# Altium PCB PCB1_MPPT_Charger_V1.PcbDoc
Units mm, origin at the board's own origin, x right, y up, seen from the top; angles counter-clockwise.
Board outline 132 x 99 mm, 2 copper layers (Top Layer, Bottom Layer); 115 components, 82 nets, 482 pads, 0 vias.
Unrouted connection lines stored in the file: 314.
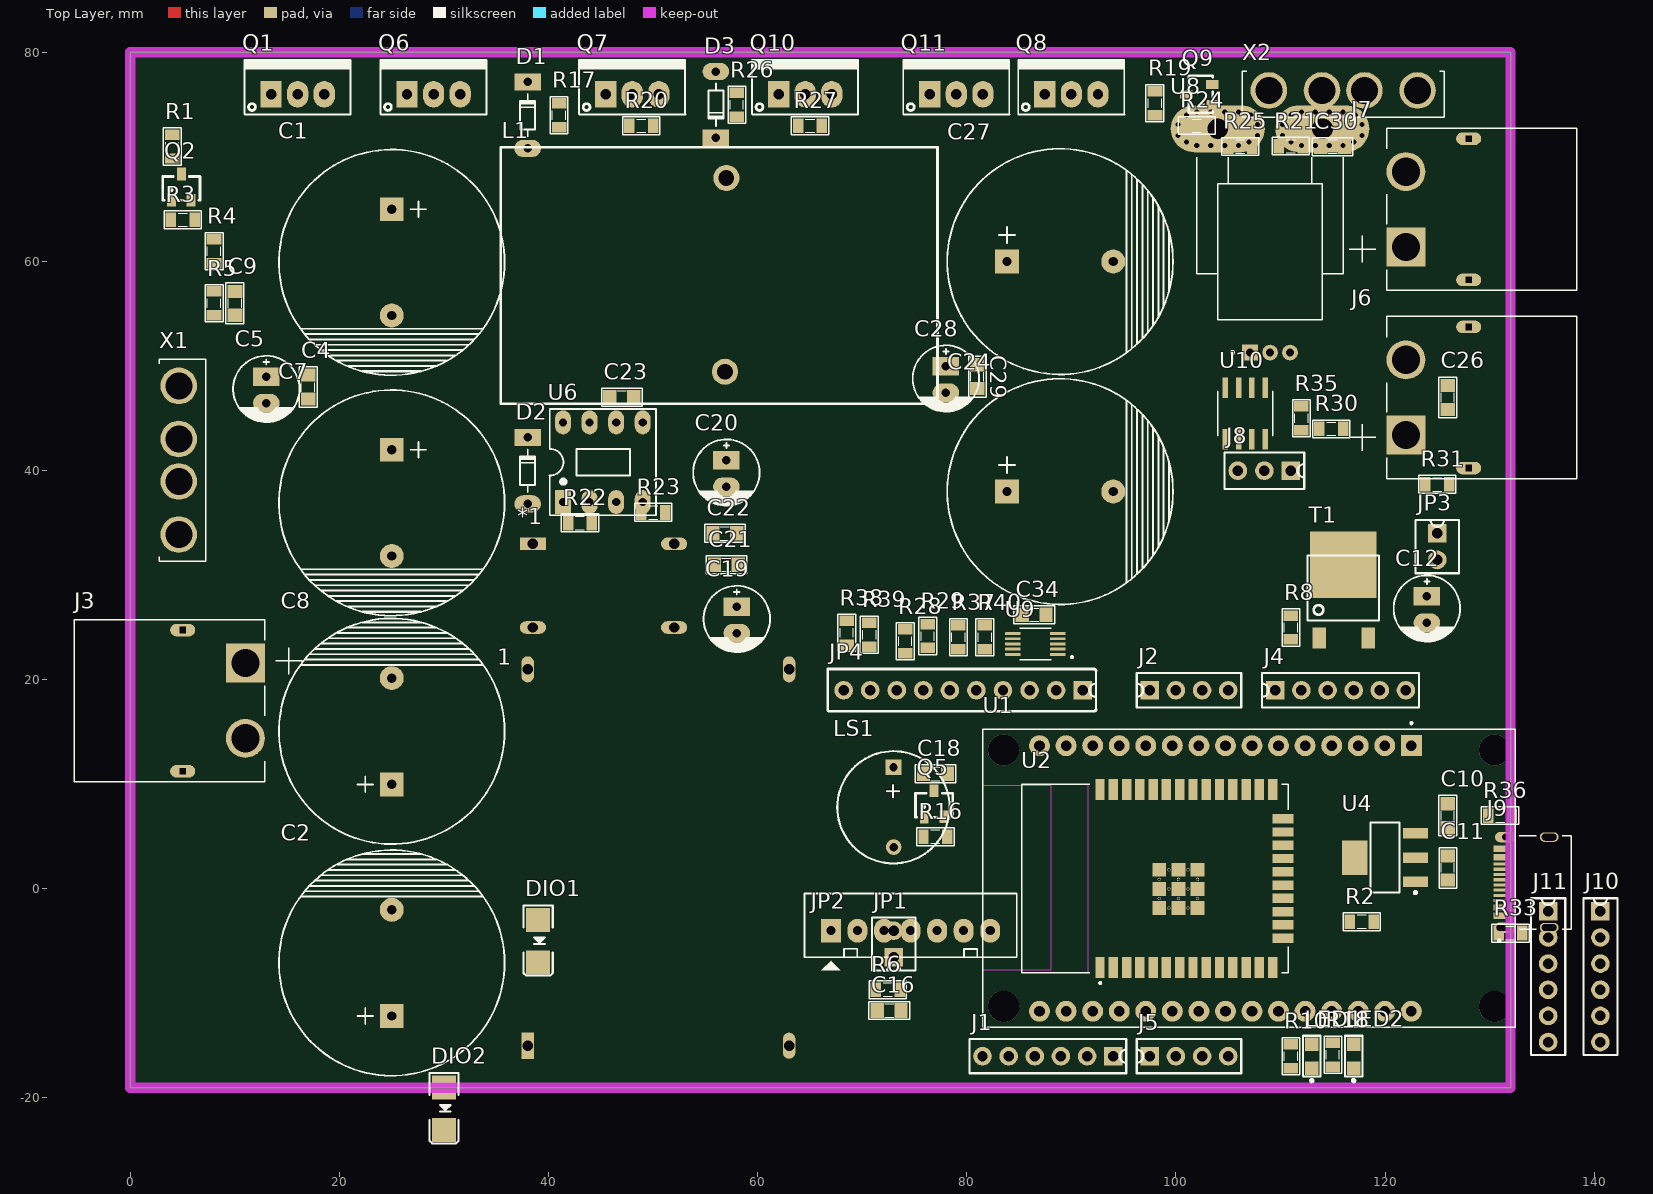
[diagram p0: Top Layer view]
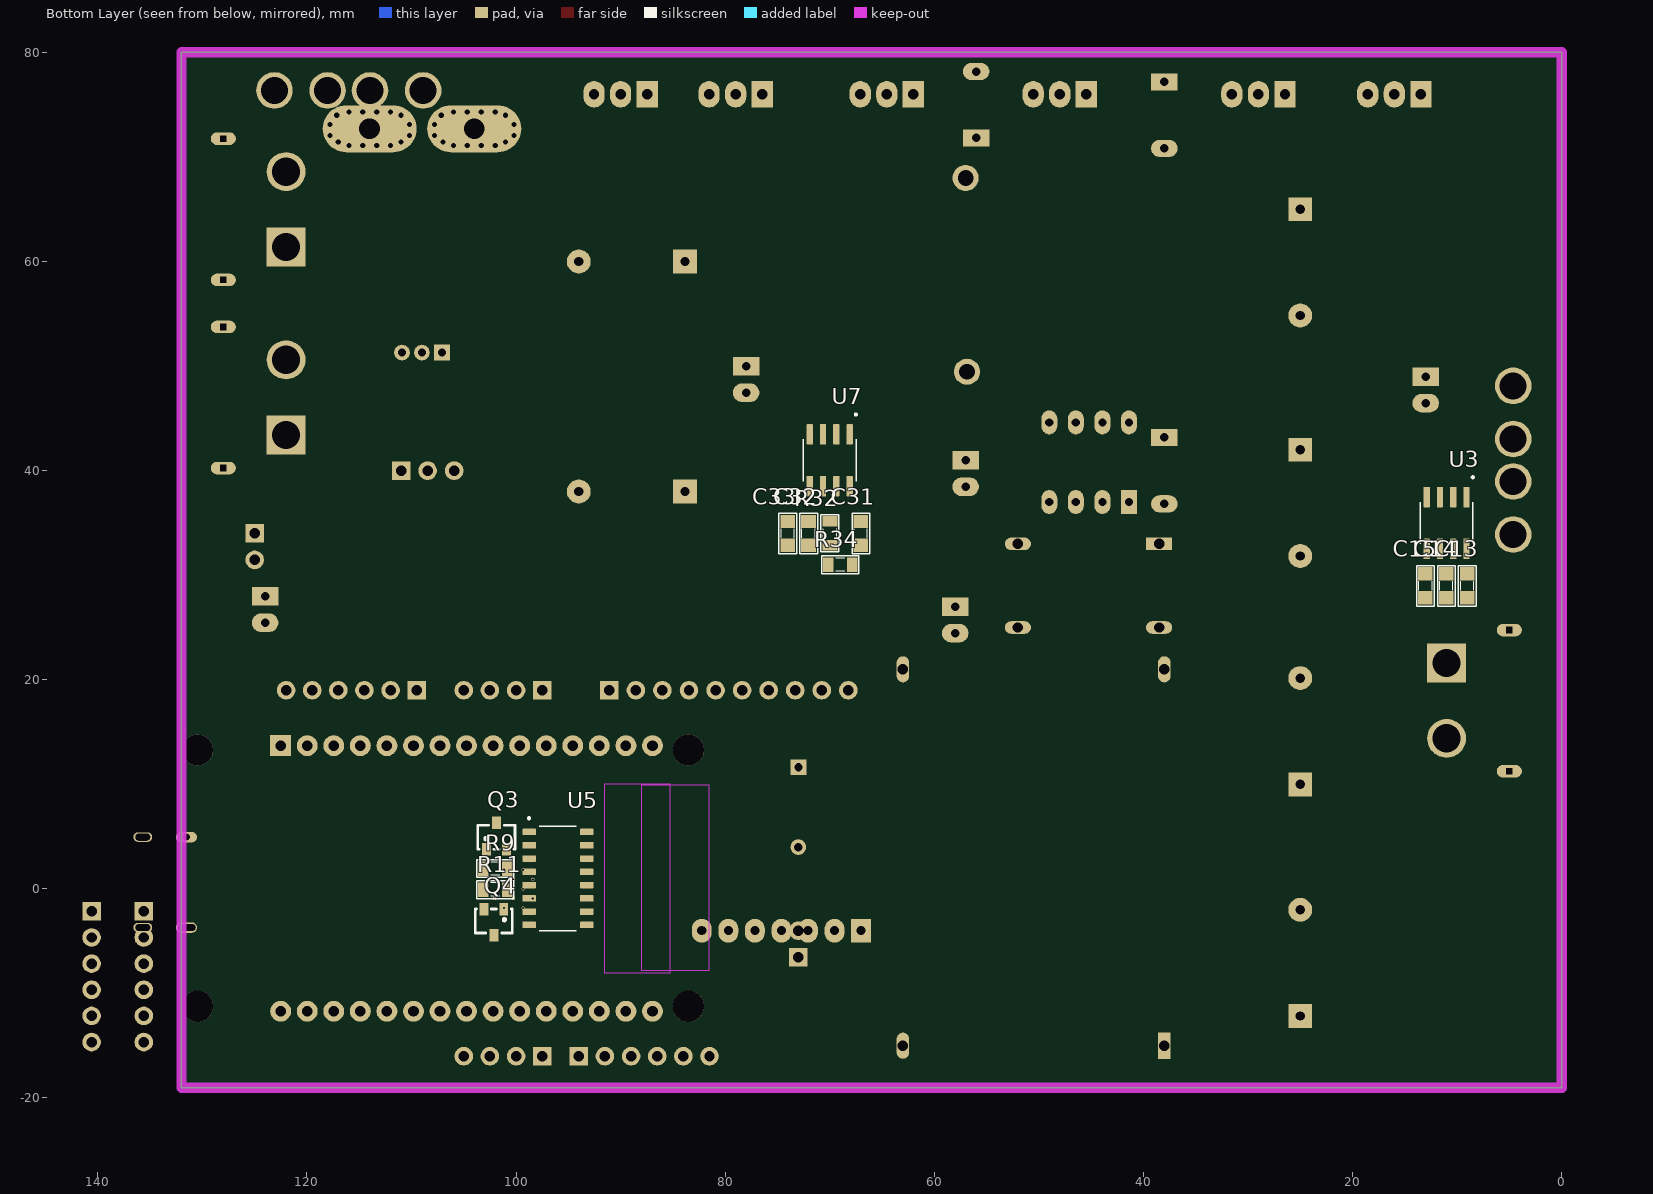
[diagram p1: Bottom Layer view, seen from below]

## Layer stack, top to bottom
Top Solder: solder mask 0.0102, Solder Resist, Dk 3.5
Top Layer: signal copper 0.0356
Dielectric 1: dielectric 0.32, FR-4, Dk 4.8
Bottom Layer: signal copper 0.0356
Bottom Solder: solder mask 0.0102, Solder Resist, Dk 3.5

## Board outline
0,-19 0,80 132,80 132,-19

## Design rules (kind name [scope] priority, off if disabled: settings)
Clearance [All] p1: gap=0.254 ignorepadtopadclearanceinfootprint=FALSE except(0: Arc-Hole Track-Hole SMDPad-Hole THPad-Hole Via-Hole Fill-Hole Poly-Hole Region-Hole Text-Hole)
PolygonConnect [All] p1: connectstyle=Relief reliefconductorwidth=0.254 reliefentries=4 polygonreliefangle="90 Angle" airgapwidth=0.254
RoomDefinition SCH_MPPT_Charger_V1 [InComponentClass('SCH_MPPT_Charger_V1')] p1: confinementstyle=ConfineIn formatcopy=TRUE lockcomponents=FALSE outline -263.398,-41.148 -212.598,-41.148 -212.598,-15.748 -263.398,-15.748
RoutingVias [All] p1: holewidth=0.711 width=1.27 viastyle="Through Hole" minholewidth=0.711 minwidth=1.27 maxholewidth=0.711 maxwidth=1.27
SolderMaskExpansion [All] p1: expansion=0.102 istentingtop=FALSE
Width [All] p1: maxlimit=0.254 minlimit=0.254 preferedwidth=0.254
30 further rules are at their usual default settings.

## Components (designator, comment, footprint, x,y, rotation, side; value= is the part's Value field where it differs from the comment)
1 "3A" "90-12V BUCK" 38,-15 r90 top
*1 "12-5V Buck" "12-5V BUCK" 38.5,33 r0 top
C1 "4700uF/50V" CP4/8.5 25,65 r270 top
C2 "4700uF/50V" CP4/8.5 25,-12.16 r90 top
C4 "104" 0805 17,48 r90 top value=0.1uF
C5 "100uF" CP1/2.5 13,49 r270 top value="47uF/16 - 50V"
C7 "4700uF/50V" CP4/8.5 25,42 r270 top
C8 "4700uF/50V" CP4/8.5 25,10 r90 top
C9 "104" 0805 10,56 r270 top value=0.1uF
C10 "104" 0805 126,7 r270 top value=0.1uF
C11 "104" 0805 126,2 r90 top value=0.1uF
C12 "100uF" CP1/2.5 124,28 r270 top value="47uF/16 - 50V"
C13 "104" 0805 9.025,29 r90 bottom value=0.1uF
C14 "104" 0805 11.025,29 r90 bottom value=0.1uF
C15 "104" 0805 13.025,29 r90 bottom value=0.1uF
C16 "104" 0805 72.568,-11.635 r180 top value=0.1uF
C18 "104" 0805 77,11 r180 top value=0.1uF
C19 "100uF" CP1/2.5 58,27 r270 top value="47uF/16 - 50V"
C20 "100uF" CP1/2.5 57,41 r270 top value="47uF/16 - 50V"
C21 "104" 0805 57,31 r180 top value=0.1uF
C22 "104" 0805 56.857,34 r180 top value=0.1uF
C23 "104" 0805 47,47 r180 top value=0.1uF
C24 "4700uF/50V" CP4/8.5 83.84,38 r0 top
C26 "104" 0805 126,47 r270 top value=0.1uF
C27 "4700uF/50V" CP4/8.5 83.84,60 r0 top
C28 "100uF" CP1/2.5 78,50 r270 top value="47uF/16 - 50V"
C29 "104" 0805 81,49 r90 top value=0.1uF
C30 "104" 0805 115,71 r0 top value=0.1uF
C31 "104" 0805 67.025,34 r90 bottom value=0.1uF
C32 "104" 0805 72.025,34 r90 bottom value=0.1uF
C33 "104" 0805 74.025,34 r90 bottom value=0.1uF
C34 "104" 0805 86.432,26.218 r180 top value=0.1uF
D1 "1N4148" D0.5A 38,74 r270 top
D2 "1N4148" D0.5A 38,40 r270 top
D3 "1N4148" D0.5A 56,75 r90 top
DIO1 "Diode SMD" DIO-SMD-106 39,-5 r90 top value=1N5007
DIO2 "Diode SMD" DIO-SMD-106 30,-21.032 r90 top value=1N5007
J1 "CON6" CON6 94,-16 r270 top
J2 "UART_PORT" CON4 97.5,19 r90 top
J3 "XT60PW-M" AMASS_XT60PW-M 5,18 r90 top
J4 "KEY" CON6 109.5,19 r90 top
J5 "I2C_PORT" CON4 97.5,-16 r90 top
J6 "BAT" AMASS_XT60PW-M 128,47 r270 top
J7 "LOAD" AMASS_XT60PW-M 128,65 r270 top
J8 "CON3" CON3 111,40 r270 top
J9 "CSP-USC16-TR" VALCON_CSP-USC16-TR 130.93,0.627 r90 top
J10 "CON6" CON6 140.602,-2.148 r0 top
J11 "CON6" CON6 135.602,-2.148 r0 top
JP1 "NTC" CON2 73,-6.54 r180 top value="Connector 2"
JP2 "LCD" CON7 67,-4 r0 top value="Connector 7"
JP3 "FAN" CON2 125,34 r0 top value="Connector 2"
JP4 "JP10" CON10 91.08,19 r270 top value="Connector 10"
L1 "60uH" 100UH 56.873,51.363 r90 top
LED1 "LED 0805" LED0805 113,-16 r90 top
LED2 "LED 0805" LED0805 117,-16 r90 top
LS1 "Speaker" SPEAKER 72.987,11.62 r270 top
Q1 "IRF840" QTO-220 13.46,76 r0 top
Q2 "C1815" SOT23B 5,67 r0 top
Q3 "C1815" SOT23B 101.746,4.931 r180 bottom
Q4 "C1815" SOT23B 102.254,-3.069 r0 bottom
Q5 "C1815" SOT23B 77,8 r0 top
Q6 "IRF840" QTO-220 26.46,76 r0 top
Q7 "IRF840" QTO-220 45.46,76 r0 top
Q8 "IRF840" QTO-220 87.46,76 r0 top
Q9 "C1815" SOT23B 102.377,76.127 r90 top
Q10 "IRF840" QTO-220 62,76 r0 top
Q11 "IRF840" QTO-220 76.46,76 r0 top
R1 "10k" RES-SMD-0805 4,71 r90 top
R2 "10k" RES-SMD-0805 117.77,-3.129 r0 top
R3 "1k" RES-SMD-0805 5,64 r0 top
R4 "220k" RES-SMD-0805 8,61 r90 top
R5 "4.7k" RES-SMD-0805 8,56 r90 top
R6 "10k" RES-SMD-0805 72.425,-9.635 r0 top
R8 "1k" RES-SMD-0805 111,25 r90 top
R9 "10k" RES-SMD-0805 102,1.931 r0 bottom
R10 "2.2k" RES-SMD-0805 111,-16 r90 top
R11 "10k" RES-SMD-0805 102,-0.069 r180 bottom
R16 "1k" RES-SMD-0805 77,5 r0 top
R17 "100" RES-SMD-0805 41,74 r270 top
R18 "1k" RES-SMD-0805 115,-15.857 r90 top
R19 "10k" RES-SMD-0805 98,75.143 r270 top
R20 "100k" RES-SMD-0805 48.857,73 r0 top
R21 "220k" RES-SMD-0805 110.995,71.031 r180 top
R22 "10k" RES-SMD-0805 43,35 r180 top
R23 "10k" RES-SMD-0805 50,36 r180 top
R24 "1k" RES-SMD-0805 102,73 r180 top
R25 "4.7k" RES-SMD-0805 106.143,71 r180 top
R26 "100" RES-SMD-0805 58,75 r90 top
R27 "100k" RES-SMD-0805 65,73 r0 top
R28 "1k" RES-SMD-0805 74.113,23.678 r270 top
R29 "10k" RES-SMD-0805 76.272,24.186 r270 top
R30 "10k" RES-SMD-0805 114.857,44 r0 top
R31 "100" RES-SMD-0805 125,38.687 r180 top
R32 "2.2k" RES-SMD-0805 69.975,34 r270 bottom
R33 "5.11k" RES-SMD-0805 132,-4.221 r0 top
R34 "3.3k" RES-SMD-0805 69,31 r0 bottom
R35 "1k" RES-SMD-0805 112,45 r90 top
R36 "5.11k" RES-SMD-0805 131,7 r180 top
R37 "1k" RES-SMD-0805 79.193,24.059 r90 top
R38 "10k" RES-SMD-0805 68.516,24.504 r270 top
R39 "10k" RES-SMD-0805 70.684,24.313 r270 top
R40 "10k" RES-SMD-0805 81.733,24.059 r270 top
T1 "TIP 41C" TO252_NEW 116.063,27.507 r0 top
U1 "ESP32-DEVKIT-V1" MODULE_ESP32_DEVKIT_V1 107,1 r270 top
U2 "ESP32-WROOM-32D" MODULE_ESP32-WROOM-32D 98,1 r90 top
U3 "ACS712ELCTR30AT" SOIC127P600X175-8N 11,35 r270 bottom
U4 "LM1117-3.3V" SOT223 120,3 r90 top
U5 "CH340G" SOIC127P600X180-16N 96,1 r180 bottom
U6 "IR2104" dip8 45.063,40.81 r0 top
U7 "ACS712ELCTR30AT" SOIC127P600X175-8N 70,41 r270 bottom
U8 "ACS758LCB-100B-PFF-T" XDCR_ACS770KCB-150U-PFF-T 109,62 r0 top
U9 "ADS1115IDGST" SOP50P490X110-10N 86.559,23.424 r180 top
U10 "MAX4213ESA" 21-0041B_8 106.635,45.464 r270 top
X1 "20A" FUSE_3522-2 5,41 r90 top
X2 "3522-2" FUSE_3522-2 116,76 r0 top

## Footprints (in the part's own frame and the unit in brackets; to place one, negate y for a bottom-side part, rotate by r counter-clockwise, add the part's x,y. Pads: shape width x height; smd on the part's side, far side on the other; paste and mask are expansions set on the pad)
"12-5V BUCK" [mm]
  rect 2.5x1.2 hole 1: 1(0,0)
  oval 2.5x1.2 hole 1: 2(0,-8) 3(13.5,-8) 4(13.5,0)
21-0041B_8 [mil]
  rect 78x21 smd: 1(-97,75) 2(-97,25) 3(-97,-25) 4(-97,-75) 5(97,-75) 6(97,-25) 7(97,25) 8(97,75)
  silkscreen extent -84,-104 84,104
"90-12V BUCK" [mm]
  rect 2.5x1.2 hole 1.016: 1(0,0)
  oval 2.5x1.2 hole 1.016: 2(0,-25) 3(36,-25) 4(36,0)
100UH [mm]
  round 2.5 hole 1.5: 1(16.637,-0.127) 2(-1.905,0)
  silkscreen extent -4.95,-20.32 19.56,21.46
0805 [mil] "Compoment SMD 80x50mil"
  rect 50x55 smd: 1(-45,0) 2(45,0)
  silkscreen extent -77,-34 76,33, body extent -40,-27 40,23, height 24
AMASS_XT60PW-M [mm]
  rect 3.716x3.716 / inner round 3.716 / far side rect 3.716x3.716 hole 2.7: 1(3.6,-6)
  round 3.716 hole 2.7: 2(-3.6,-6)
  oval 1.2x2.4 hole 0.6 square: S1(6.75,0) S2(-6.75,0)
  silkscreen extent -7.75,-11.43 7.75,10.35, body extent -7.75,-7.85 7.75,10.35, height 8.4
CON2 [mil]
  rect 70x70 hole 39.37 unplated: 1(0,0)
  round 70 hole 39.37 unplated: 2(0,-100)
  silkscreen extent -82,-150 82,50
CON3 [mil]
  rect 70x70 hole 39.37 unplated: 1(0,0)
  round 70 hole 39.37 unplated: 2(0,-100) 3(0,-200)
  silkscreen extent -68,-250 68,50
CON4 [mil]
  rect 70x70 hole 39.37 unplated: 1(0,0)
  round 70 hole 39.37 unplated: 2(0,-98.43) 3(0,-196.85) 4(0,-295.28)
  silkscreen extent -64,-344 64,49
CON6 [mil]
  rect 70x70 hole 39.37 unplated: 1(0,0)
  round 70 hole 39.37 unplated: 2(0,-98.43) 3(0,-196.85) 4(0,-295.28) 5(0,-393.7) 6(0,-492.13)
  silkscreen extent -64,-541 64,49
CON7 [mil] "CON7"
  rect 75x90 hole 34: 1(0,0)
  oval 75x90 hole 34: 2(100,0) 3(200,0) 4(300,0) 5(400,0) 6(500,0) 7(600,0)
  silkscreen extent -100,-150 700,140
CON10 [mil]
  rect 70x70 hole 39.37 unplated: 1(0,0)
  round 70 hole 39.37 unplated: 2(0,-100) 3(0,-200) 4(0,-300) 5(0,-400) 6(0,-500) 7(0,-600) 8(0,-700) 9(0,-800) 10(0,-900)
  silkscreen extent -80,-960 79,50
CP1/2.5 [mil] "Tu hoa 33 >100 uF,50V, 220uF/16V,25V"
  rect 70x100 hole 32: 1(0,0)
  oval 70x100 hole 32: 2(100,0)
  silkscreen extent -78,-125 172,125, body extent -76,-124 172,124, height 422
CP4/8.5 [mil] "Tu hoa 4700uF/50V"
  rect 90x90 hole 35: 1(0,0)
  round 90 hole 35: 2(400,0)
  silkscreen extent -225,-425 625,425, body extent -236,-438 630,428, height 984
D0.5A [mil] "Diode muoi, W 80mil, L 300mil"
  oval 65x100 hole 32: 1(125,0)
  rect 65x100 hole 32: 2(-125,0)
  silkscreen extent -80,-30 80,28, body extent -108,-33 108,32, height 61
DIO-SMD-106 [mil]
  rect 90x90.55 smd: 1(80,0) 2(-80,0)
  silkscreen extent -130,-55 135,55, body extent -99,-50 106,52, height 95
dip8 [mil] "DIP, 8-Leads, Row Spacing 7.62mm, Pitch 2.54mm, Body 9.91x6.73mm"
  rect 60x90 hole 31: 1(-145,-150)
  oval 60x90 hole 31: 2(-45,-150) 3(55,-150) 4(155,-150) 5(155,150) 6(55,150) 7(-45,150) 8(-145,150)
  silkscreen extent -195,-200 205,200, body extent -213,-153 213,153, height 177
FUSE_3522-2 [mm]
  round 3.5 hole 2.59: 1A(-7.11,0.37) 1B(-2.03,0.37) 2A(2.03,0.37) 2B(7.11,0.37)
  silkscreen extent -9.65,-2.22 9.65,2.22
LED0805 [mil] "Chip Resistor; Body 2.0 x 1.3 mm (LxW typ)"
  rect 50x50 smd: 1(-45,0) 2(45,0)
  silkscreen extent -97,-33 77,33, body extent -60,-25 60,25, height 47
MODULE_ESP32-WROOM-32D [mm]
  rect 2x0.9 smd: 1(-8.5,5.26) 2(-8.5,3.99) 3(-8.5,2.72) 4(-8.5,1.45) 5(-8.5,0.18) 6(-8.5,-1.09) 7(-8.5,-2.36) 8(-8.5,-3.63) 9(-8.5,-4.9) 10(-8.5,-6.17) 11(-8.5,-7.44) 12(-8.5,-8.71) 13(-8.5,-9.98) 14(-8.5,-11.25) 25(8.5,-11.25) 26(8.5,-9.98) 27(8.5,-8.71) 28(8.5,-7.44) 29(8.5,-6.17) 30(8.5,-4.9) 31(8.5,-3.63) 32(8.5,-2.36) 33(8.5,-1.09) 34(8.5,0.18) 35(8.5,1.45) 36(8.5,2.72) 37(8.5,3.99) 38(8.5,5.26)
  rect 0.9x2 smd: 15(-5.715,-12.25) 16(-4.445,-12.25) 17(-3.175,-12.25) 18(-1.905,-12.25) 19(-0.635,-12.25) 20(0.635,-12.25) 21(1.905,-12.25) 22(3.175,-12.25) 23(4.445,-12.25) 24(5.715,-12.25)
  rect 1.33x1.33 smd: 39_1(-2.835,-0.405) 39_2(-1,-0.405) 39_3(0.835,-0.405) 39_4(-2.835,-2.24) 39_5(-1,-2.24) 39_6(0.835,-2.24) 39_7(-2.835,-4.075) 39_8(-1,-4.075) 39_9(0.835,-4.075)
  round 0.3 hole 0.2: 39_10(-1.917,-0.405) 39_11(-0.082,-0.405) 39_12(-2.835,-1.322) 39_13(-1,-1.322) 39_14(0.835,-1.322) 39_15(-1.917,-2.24) 39_16(-0.082,-2.24) 39_17(-2.835,-3.157) 39_18(-1,-3.157) 39_19(0.835,-3.157) 39_20(-1.917,-4.075) 39_21(-0.082,-4.075)
  Keep-Out Layer region: 9,6.45 -9,6.45 -9,12.75 9,12.75
  silkscreen extent -10.1,-12.75 9,12.75, body extent -9,-12.75 9,12.75, height 3.25
MODULE_ESP32_DEVKIT_V1 [mm]
  rect 2x2 / inner round 2 / far side rect 2x2 hole 1.02: 1(-12.7,15.515)
  round 2 hole 1.02: 2(-12.7,12.975) 3(-12.7,10.435) 4(-12.7,7.895) 5(-12.7,5.355) 6(-12.7,2.815) 7(-12.7,0.275) 8(-12.7,-2.265) 9(-12.7,-4.805) 10(-12.7,-7.345) 11(-12.7,-9.885) 12(-12.7,-12.425) 13(-12.7,-14.965) 14(-12.7,-17.505) 15(-12.7,-20.045) 16(12.7,-20.045) 17(12.7,-17.505) 18(12.7,-14.965) 19(12.7,-12.425) 20(12.7,-9.885) 21(12.7,-7.345) 22(12.7,-4.805) 23(12.7,-2.265) 24(12.7,0.275) 25(12.7,2.815) 26(12.7,5.355) 27(12.7,7.895) 28(12.7,10.435) 29(12.7,12.975) 30(12.7,15.515)
  round 3 hole 3 unplated: ""(-12.28,23.475) ""(-12.28,-23.475) ""(12.23,23.475) ""(12.23,-23.475)
  Keep-Out Layer region: 8.78,-25.475 -8.91,-25.475 -8.91,-18.985 8.78,-18.985
  Keep-Out Layer region: 8.78,-25.475 -8.91,-25.475 -8.91,-18.985 8.78,-18.985
  silkscreen extent -14.95,-25.48 14.23,25.48
QTO-220 [mil] "TO-220 - 1-2-3"
  rect 80x100 hole 39: 1(0,0)
  oval 80x100 hole 39: 2(100,0) 3(200,0)
  silkscreen extent -100,-76 300,130, body extent -119,-64 322,121, height 755
RES-SMD-0805 [mil]
  rect 39.37x55 smd: 1(-45,0) 2(45,0)
  silkscreen extent -70,-34 70,33, body extent -39,-25 39,25, height 31
SOIC127P600X175-8N [mm]
  rrect25% 1.97x0.6 smd: 1(-2.475,1.905) 2(-2.475,0.635) 3(-2.475,-0.635) 4(-2.475,-1.905) 5(2.475,-1.905) 6(2.475,-0.635) 7(2.475,0.635) 8(2.475,1.905)
  silkscreen extent -4.47,-2.52 2,2.6, body extent -2.45,-3 2.45,3, height 1.75
SOIC127P600X180-16N [mm]
  rrect25% 1.31x0.62 smd: 1(-2.75,4.445) 2(-2.75,3.175) 3(-2.75,1.905) 4(-2.75,0.635) 5(-2.75,-0.635) 6(-2.75,-1.905) 7(-2.75,-3.175) 8(-2.75,-4.445) 9(2.75,-4.445) 10(2.75,-3.175) 11(2.75,-1.905) 12(2.75,-0.635) 13(2.75,0.635) 14(2.75,1.905) 15(2.75,3.175) 16(2.75,4.445)
  silkscreen extent -2.85,-5 1.78,5.85, body extent -3,-5 3,5, height 1.8
SOP50P490X110-10N [mm]
  rrect25% 1.47x0.28 smd: 1(-2.15,1) 2(-2.15,0.5) 3(-2.15,0) 4(-2.15,-0.5) 5(-2.15,-1) 6(2.15,-1) 7(2.15,-0.5) 8(2.15,0) 9(2.15,0.5) 10(2.15,1)
  silkscreen extent -3.6,-1.5 1.5,1.5
SOT23B [mm] "SOT 23B"
  rect 0.85x1.2 smd: 1(-1.077,-1.123) 2(-0.127,1.377) 3(0.813,-1.118)
  silkscreen extent -1.91,-1.14 1.65,1.14, body extent -1.63,-1.17 1.37,1.33, height 1.06
SOT223 [mm]
  rect 1x2.4 smd: 1(-2.3,-2.9) 2(0,-2.9) 3(2.3,-2.9)
  rect 3.3x2.4 smd: 4(0,2.9)
  silkscreen extent -3.47,-3.03 3.35,1.4, body extent -3.25,-3.56 3.25,3.4, height 1.68
SPEAKER [mm]
  rect 1.5x1.5 hole 0.8: 1(0,0)
  round 1.5 hole 0.8: 2(7.62,0.013)
  silkscreen extent -1.55,-5.38 9.18,5.36, body extent -2.22,-6 13.24,6, height 4.5
TO252_NEW [mil]
  rect 51.18x78.74 smd: 1(-92.5,-137.5) 3(92.5,-137.5)
  rect 250x250 smd: 2(-2.5,137.5)
  silkscreen extent -138,-72 132,172, body extent -132,-163 127,219, height 91
VALCON_CSP-USC16-TR [mm]
  rect 0.3x1.14 smd: A1(-3.35,0) A4(-2.55,0) A5(-1.25,0) A6(-0.25,0) A7(0.25,0) A8(1.25,0) A9(2.55,0) A12(3.35,0) B1(3.05,0) B4(2.25,0) B5(1.75,0) B6(0.75,0) B7(-0.75,0) B8(-1.75,0) B9(-2.25,0) B12(-3.05,0)
  oval 1x2 hole 0.65 slot 1.72 at 90 deg: S1(-4.325,-0.59)
  oval 1x2 hole 0.65: S2(4.325,-0.59)
  oval 0.9x1.8 hole 0.65 slot 1.4 at 90 deg: S3(-4.325,-4.77) S4(4.325,-4.77)
  round 0.65 hole 0.65 unplated: ""(-2.89,-1.07) ""(2.89,-1.07)
  silkscreen extent -5.67,-6.86 4.47,0.1, body extent -4.47,-6.28 4.47,1.47, height 3.26
XDCR_ACS770KCB-150U-PFF-T [mm]
  rect 1.5x1.5 / inner round 1.5 / far side rect 1.5x1.5 hole 0.8: 1(-1.91,-10.7)
  round 1.5 hole 0.8: 2(0,-10.7) 3(1.91,-10.7)
  oval 9x4.5 hole 2: 4(5,10.7) 5(-5,10.7)
  round 0.8 hole 0.5: 4_1(3,9.1) 4_2(4.33,9.1) 4_3(5.66,9.1) 4_4(6.99,9.1) 4_5(8,9.43) 4_6(8.8,10.05) 4_7(8.8,11.1) 4_8(8.15,12) 4_9(6.99,12.3) 4_10(5.66,12.3) 4_11(4.33,12.3) 4_12(3,12.3) 4_13(2,12) 4_14(1.2,11.1) 4_15(1.2,10.05) 4_16(2,9.43) 5_1(-7,9.1) 5_2(-5.67,9.1) 5_3(-4.34,9.1) 5_4(-3.01,9.1) 5_5(-8,9.43) 5_6(-8.8,10.05) 5_7(-8.8,11.1) 5_8(-8,12) 5_9(-7,12.3) 5_10(-5.67,12.3) 5_11(-4.34,12.3) 5_12(-3.01,12.3) 5_13(-1.85,12) 5_14(-1.2,11.1) 5_15(-1.2,10.05) 5_16(-2,9.43)
  silkscreen extent -7,-10.82 7,8, body extent -7,-11.15 7,11.45, height 8

## Part data
1: library part "90-12V  Buck"
*1: "3A"
C1 C2 C7 C8 C24 C27: library part CP7, "Cap 4700uF/50V"
C4 C9 C10 C11 C13 C14 C15 C16 C18 C21 C22 C23 C26 C29 C30 C31 C32 C33 C34: library part "Cap 104", "Capacitor (Semiconductor SIM Model)", LatestRevisionDate=17-Jul-2002, LatestRevisionNote="Re-released for DXP Platform.", PackageReference=C1206, Published=8-Jun-2000, Publisher="Altium Limited"
C5 C12 C19 C20 C28: library part CP2, "C 47uF/50V , 220uF/16V", Description 1="470uF/6,3V - 330uF/10V - 220uF/16V", Description 2="100uF/25V - 35V - 47uF/50V - 22uF/100V", Description 3="33uF => 47uF/63V - 1uF => 4,7uF/160V", Description 4="1uF => 2,2uF/250V - 1uF/350V"
D1 D2 D3: library part D0.5A, "D0.5A"
DIO1 DIO2: "Default Diode", Code - JEDEC=DO-214-AB, Published=8-Jun-2000, Publisher="Altium Limited", Revision="July-2002: Re-released for DXP Platform."
J1 J8 J10 J11: "Connector"
J2 J5: library part CON4, "Connector"
J3: "Socket, DC supply, male, PIN: 2", Package=Package, Availability="Not in stock", Check_prices=https://www.snapeda.com/parts/XT60PW-M/AMASS/view-part/?ref=eda, MF=AMASS, MP=XT60PW-M, Price=None, SnapEDA_Link=https://www.snapeda.com/parts/XT60PW-M/AMASS/view-part/?ref=snap
J4: library part CON6, "Connector"
J6 J7: library part XT60PW-M, "Socket, DC supply, male, PIN: 2", Package=Package, Availability="Not in stock", Check_prices=https://www.snapeda.com/parts/XT60PW-M/AMASS/view-part/?ref=eda, MF=AMASS, MP=XT60PW-M, Price=None, SnapEDA_Link=https://www.snapeda.com/parts/XT60PW-M/AMASS/view-part/?ref=snap
J9: "CSP-USC16-TR Valcon USB Type C Surface Mount PCB Socket", Package=None, Availability="In Stock", Check_prices=https://www.snapeda.com/parts/CSP-USC16-TR/Valcon/view-part/?ref=eda, MF=Valcon, MP=CSP-USC16-TR, Price=None, Purchase-URL=https://pricing.snapeda.com/search/part/CSP-USC16-TR/?ref=eda, SnapEDA_Link=https://www.snapeda.com/parts/CSP-USC16-TR/Valcon/view-part/?ref=snap
JP1 JP3: library part CON2, "Connector 2"
JP2: library part Con7, "Connector 7"
JP4: library part Con10, "Connector 10"
L1: library part INDUCTOR
LED1 LED2: library part LEDSMD, "Dán", Chung_Loai=Dán, Don_Vi=Con
LS1: "Loudspeaker", LatestRevisionDate=17-Jul-2002, LatestRevisionNote="Re-released for DXP Platform.", PackageReference=PIN2, Published=24-Mar-1999, Publisher="Altium Limited"
Q1 Q6 Q7 Q8 Q10 Q11: "MOSFET N - CHANNEL 500V - 0.75 - 8A - TO-220"
Q2 Q3 Q4 Q5 Q9: "Dán", Chung_Loai=Dán, Don_Vi=Con, Ma_Hang=MH000946, Ten_Linh_Kien="C1815 SOT23 TRANS NPN 0.15A 50V (SMD-HF)"
R1 R2 R3 R4 R5 R6 R8 R9 R10 R11 R16 R17 R18 R19 R20 R21 R22 R23 R24 R25 R26 R27 R28 R29 R30 R31 R32 R33 R34 R35 R36 R37 R38 R39 R40: library part Res-SMD, "Resistor", Manufacturer="Generic Components", Class=Passive, Published=08/06/2000, Publisher="Altium Hobart Technology Centre"
T1: library part TIP41C_SMD, "Dán", Chung_Loai=Dán, Don_Vi=Con, Ma_Hang=MH007260, Ten_Linh_Kien="TIP42C TO252 TRANS PNP 6A 100V (SMD-J42C)"
U1: "Dual core, Wi-Fi: 2.4 GHz up to 150 Mbits/s,BLE (Bluetooth Low Energy) and legacy Bluetooth, 32 bits, Up to 240 MHz", Package=None, Availability="Not in stock", Check_prices=https://www.snapeda.com/parts/ESP32-DEVKIT-V1/Do+it/view-part/?ref=eda, MF="Do it", MP=ESP32-DEVKIT-V1, Price=None, SnapEDA_Link=https://www.snapeda.com/parts/ESP32-DEVKIT-V1/Do+it/view-part/?ref=snap
U2: "Bluetooth, WiFi 802.11b/g/n, Bluetooth v4.2 +EDR, Class 1, 2 and 3 Transceiver Module 2.4GHz ~ 2.5GHz Integrated", Package="Module Espressif Systems", Availability="In Stock", Check_prices=https://www.snapeda.com/parts/ESP32-WROOM-32D/Espressif+Systems/view-part/?ref=eda, MF="Espressif Systems", MP=ESP32-WROOM-32D, Price=None, Purchase-URL=https://pricing.snapeda.com/search/part/ESP32-WROOM-32D/?ref=eda, SnapEDA_Link=https://www.snapeda.com/parts/ESP32-WROOM-32D/Espressif+Systems/view-part/?ref=snap
U3 U7: "Current Sensor 30A 1 Channel Hall Effect, Open Loop Bidirectional 8-SOIC (0.154, 3.90mm Width)", Package="SOIC-8 Allegro MicroSystems LLC", Availability="In Stock", Check_prices=https://www.snapeda.com/parts/ACS712ELCTR-30A-T/Allegro+Industries/view-part/?ref=eda, MF=Allegro, MP=ACS712ELCTR-30A-T, Price=None, Purchase-URL=https://pricing.snapeda.com/search/part/ACS712ELCTR-30A-T/?ref=eda, SnapEDA_Link=https://www.snapeda.com/parts/ACS712ELCTR-30A-T/Allegro+Industries/view-part/?ref=snap
U4: library part LM1117, "800mA Low-Dropout Linear Regulator", Creator="Nguyen Ba Bien", Website=http://group3i.net
U5: "USB Interface Integrated Circuit", Package=None, Availability="Not in stock", Check_prices=https://www.snapeda.com/parts/Ch340G/WCH/view-part/?ref=eda, MF=WCH, MP=Ch340G, Price=None, SnapEDA_Link=https://www.snapeda.com/parts/Ch340G/WCH/view-part/?ref=snap
U6: library part IR2103
U8: "Current Sensor 100A 1 Channel Hall Effect, Open Loop Bidirectional 5-CB Formed Leads, PFF", Package="5-CB-5 Allegro MicroSystems LLC", Availability="In Stock", Check_prices=https://www.snapeda.com/parts/ACS758LCB-100B-PFF-T/Allegro+Industries/view-part/?ref=eda, MF=Allegro, MP=ACS758LCB-100B-PFF-T, Price=None, Purchase-URL=https://pricing.snapeda.com/search/part/ACS758LCB-100B-PFF-T/?ref=eda, SnapEDA_Link=https://www.snapeda.com/parts/ACS758LCB-100B-PFF-T/Allegro+Industries/view-part/?ref=snap
U9 U10 X2: Package=None, Availability=Unavailable, Price=None
  U9: MP=ADS1115IDGST
  U10: MP=MAX4213ESA
  X2: MF="{'manufacturer': u'Keystone Electronics'}", MP=3522-2
X1: library part 3522-2, Package=None, Availability=Unavailable, MF="{'manufacturer': u'Keystone Electronics'}", MP=3522-2, Price=None

## Nets (pads, with @x,y where several pads share a name; then routed paths per layer and width w, separated by ;. In a path a pad name is that pad's centre, name@x,y a point inside that pad or via, vN(x,y) a via of type N, cw(c..) or ccw(c..) an arc to the next point about the centre after c; other vN are vias at no path point)
3.3V: C11.2 J4.6 J5.4 JP1.2 R2.2 U1.1 U2.2 U4.2 U5.4 U5.16
+5V: *1.4 C10.2 C14.2 C15.2 C18.2 C20.1 C21.1 C22.1 C32.2 C33.2 D2.1 J8.1 J9.A4 J9.A9 J9.B4 J9.B9 JP2.7 JP4.10 LS1.1 R18.1 R28.1 R30.1 R38.2 R39.1 R40.2 U1.30 U3.8 U4.3 U6.1 U7.8 U8.1 U10.7
+12V: 1.4 *1.1 C12.1 C19.1 JP3.1 Q2.2 Q9.2 R1.1 R10.1 R19.1
A0: C9.2 JP4.4 R4.2 R5.1 U9.4
A1: JP4.3 U3.7 U9.5
A2: C30.2 JP4.2 R21.2 R25.1 U9.6
A3: J8.3 JP4.1 R35.1 U9.7 U10.6
ADDR: JP4.6 R29.1 U9.1
ALERT: JP4.5
BACK: J4.5 U1.28 U2.16
Buck12V_IN: 1.1 DIO1.2 DIO2.2
CLOCK: JP2.3 U1.9 U2.30
CS: JP2.6 U1.8 U2.29
D+: J9.A6 J9.B6 U5.5
D-: J9.A7 J9.B7 U5.6
DATA: JP2.2 U1.15 U2.37
DC: JP2.4 U1.10 U2.31
DOWN: J4.3 U1.26 U2.13
ESP_EN: Q4.2 R2.1 U1.16 U2.3
ESP_IO0: Q3.2 U2.25
FAN_EN: R8.2 U1.4 U2.24
GND: 1.2 1.3 *1.2 *1.3 C4.1 C5.2 C7.2 C8.2 C10.1 C11.1 C12.2 C13.1 C14.1 C15.1 C16.1 C18.1 C19.2 C20.2 C21.2 C22.2 C27.2 C28.2 C29.1 C31.1 C32.1 C33.1 J4.1 J5.3 J8.2 J9.A1 J9.A12 J9.B1 J9.B12 J9.S1 J9.S2 J9.S3 J9.S4 JP2.1 JP4.9 LED1.2 LED2.2 Q2.3 Q5.3 Q10.3 Q11.3 R6.2 R22.1 R23.1 R27.2 R29.2 R33.2 R34.2 R36.2 R37.1 T1.3 U1.2 U1.29 U2.1 U2.15 U2.38 U2.39_1 U2.39_2 U2.39_3 U2.39_4 U2.39_5 U2.39_6 U2.39_7 U2.39_8 U2.39_9 U2.39_10 U2.39_11 U2.39_12 U2.39_13 U2.39_14 U2.39_15 U2.39_16 U2.39_17 U2.39_18 U2.39_19 U2.39_20 U2.39_21 U3.1 U3.2 U3.6 U4.1 U5.1 U6.4 U7.3 U7.4 U7.6 U8.2 U10.4
LOAD_EN: R24.2 U1.23 U2.10
MOSFET_TEMP: C16.2 JP1.1 R6.1 U1.24 U2.11
MPPT_Isens: R32.2 R34.1 U1.19 U2.6
NetC1_2: C1.2 C7.1
NetC2_2: C2.2 C8.1
NetC9_1: C9.1 J3.2 R5.2 U3.3 U3.4
NetC13_2: C13.2 U3.5
NetC23_1: C23.1 L1.1 Q6.3 Q7.3 Q10.2 Q11.2 R20.2 U6.6
NetC23_2: C23.2 D2.2 U6.8
NetC24_1: C24.1 C26.2 C27.1 C28.1 C29.2 DIO2.1 J6.1 L1.2 Q8.3 R21.1
NetC24_2: C24.2 C26.1 J6.2 U7.1 U7.2 U8.5
NetC30_1: C30.1 J7.2 Q9.3 R25.2 U8.4
NetC31_2: C31.2 U7.5
NetC34_1: C34.1 R37.2 U9.3
NetC34_2: C34.2 R28.2 U9.8
NetD1_1: D1.1 Q6.1 Q7.1 R17.1 R20.1
NetD1_2: D1.2 R17.2 U6.7
NetD3_1: D3.1 Q10.1 Q11.1 R26.2 R27.1
NetD3_2: D3.2 R26.1 U6.5
NetDIO1_1: DIO1.1 Q1.3 R4.1 X1.2A X1.2B
NetJ3_1: J3.1 X1.1A X1.1B
NetJ7_1: J7.1 X2.2A X2.2B
NetJ9_A5: J9.A5 R33.1
NetJ9_B5: J9.B5 R36.1
NetJP3_2: JP3.2 T1.2
NetLED1_1: LED1.1 R10.2
NetLED2_1: LED2.1 R18.2
NetLS1_2: LS1.2 Q5.2
NetQ1_1: Q1.1 R1.2
NetQ2_1: Q2.1 R3.1
NetQ3_1: Q3.1 R9.2
NetQ3_3: Q3.3 R11.1 U5.13
NetQ4_1: Q4.1 R11.2
NetQ4_3: Q4.3 R9.1 U5.14
NetQ5_1: Q5.1 R16.1
NetQ8_1: Q8.1 R19.2
NetQ8_2: Q8.2 X2.1A X2.1B
NetQ9_1: Q9.1 R24.1
NetR8_1: R8.1 T1.1
NetR30_2: R30.2 U10.8
NetR31_1: R31.1 U10.3
NetR31_2: R31.2 U8.3
NetR32_1: R32.1 U7.7
NetR35_2: R35.2 U10.2
NetR38_1: R38.1 U9.2
PN_EN: R3.2 U1.3 U2.23
PV_IN: C1.1 C2.1 C4.2 C5.1 Q1.2 Q6.2 Q7.2
PWM: R22.2 U1.22 U2.9 U6.2
RST: JP2.5 U1.17 U2.4
RX0: J2.1 U1.12 U2.34 U5.2
RX2: J2.3 U1.6 U2.27
SCL: J5.1 JP4.8 R39.2 U1.14 U2.36 U9.10
SDA: J5.2 JP4.7 R40.1 U1.11 U2.33 U9.9
SELECT: J4.2 U1.25 U2.12
SHUTDOWN: R23.2 U1.21 U2.8 U6.3
SPK_EN: R16.2 U1.20 U2.7
TX0: J2.2 U1.13 U2.35 U5.3
TX2: J2.4 U1.7 U2.28
UP: J4.4 U1.27 U2.14
VN: U1.18 U2.5
pads on no net: J1.1 J1.2 J1.3 J1.4 J1.5 J1.6 J3.S1 J3.S2 J6.S1 J6.S2 J7.S1 J7.S2 J9. J9.A8 J9.B8 J10.1 J10.2 J10.3 J10.4 J10.5 J10.6 J11.1 J11.2 J11.3 J11.4 J11.5 J11.6 U1. U1.5 U2.17 U2.18 U2.19 U2.20 U2.21 U2.22 U2.26 U2.32 U4.4 U5.7 U5.8 U5.9 U5.10 U5.11 U5.12 U5.15 U8.4_1 U8.4_2 U8.4_3 U8.4_4 U8.4_5 U8.4_6 U8.4_7 U8.4_8 U8.4_9 U8.4_10 U8.4_11 U8.4_12 U8.4_13 U8.4_14 U8.4_15 U8.4_16 U8.5_1 U8.5_2 U8.5_3 U8.5_4 U8.5_5 U8.5_6 U8.5_7 U8.5_8 U8.5_9 U8.5_10 U8.5_11 U8.5_12 U8.5_13 U8.5_14 U8.5_15 U8.5_16 U10.1 U10.5

## Keep-outs
Keep-Out Layer:
  the board outline again, w1

## Dimensions
0,80 to 0,-19 on Mechanical 10 (Mech10)
0,80 to 132,80 on Mechanical 10 (Mech10)

## Text inside footprints (layer, text, board x,y; h text height)
J9: Mechanical 13 "PCB Edge" at 137.53,-1.443 h0.7 r90
LS1: Top Overlay "+" at 72.276,10.21 h1.52 r270
U2: Mechanical 13 "ANTENNA" at 89,-5 h1.78 r90